# EAGLE board MLX-Panel (EAGLE 7.7.0)
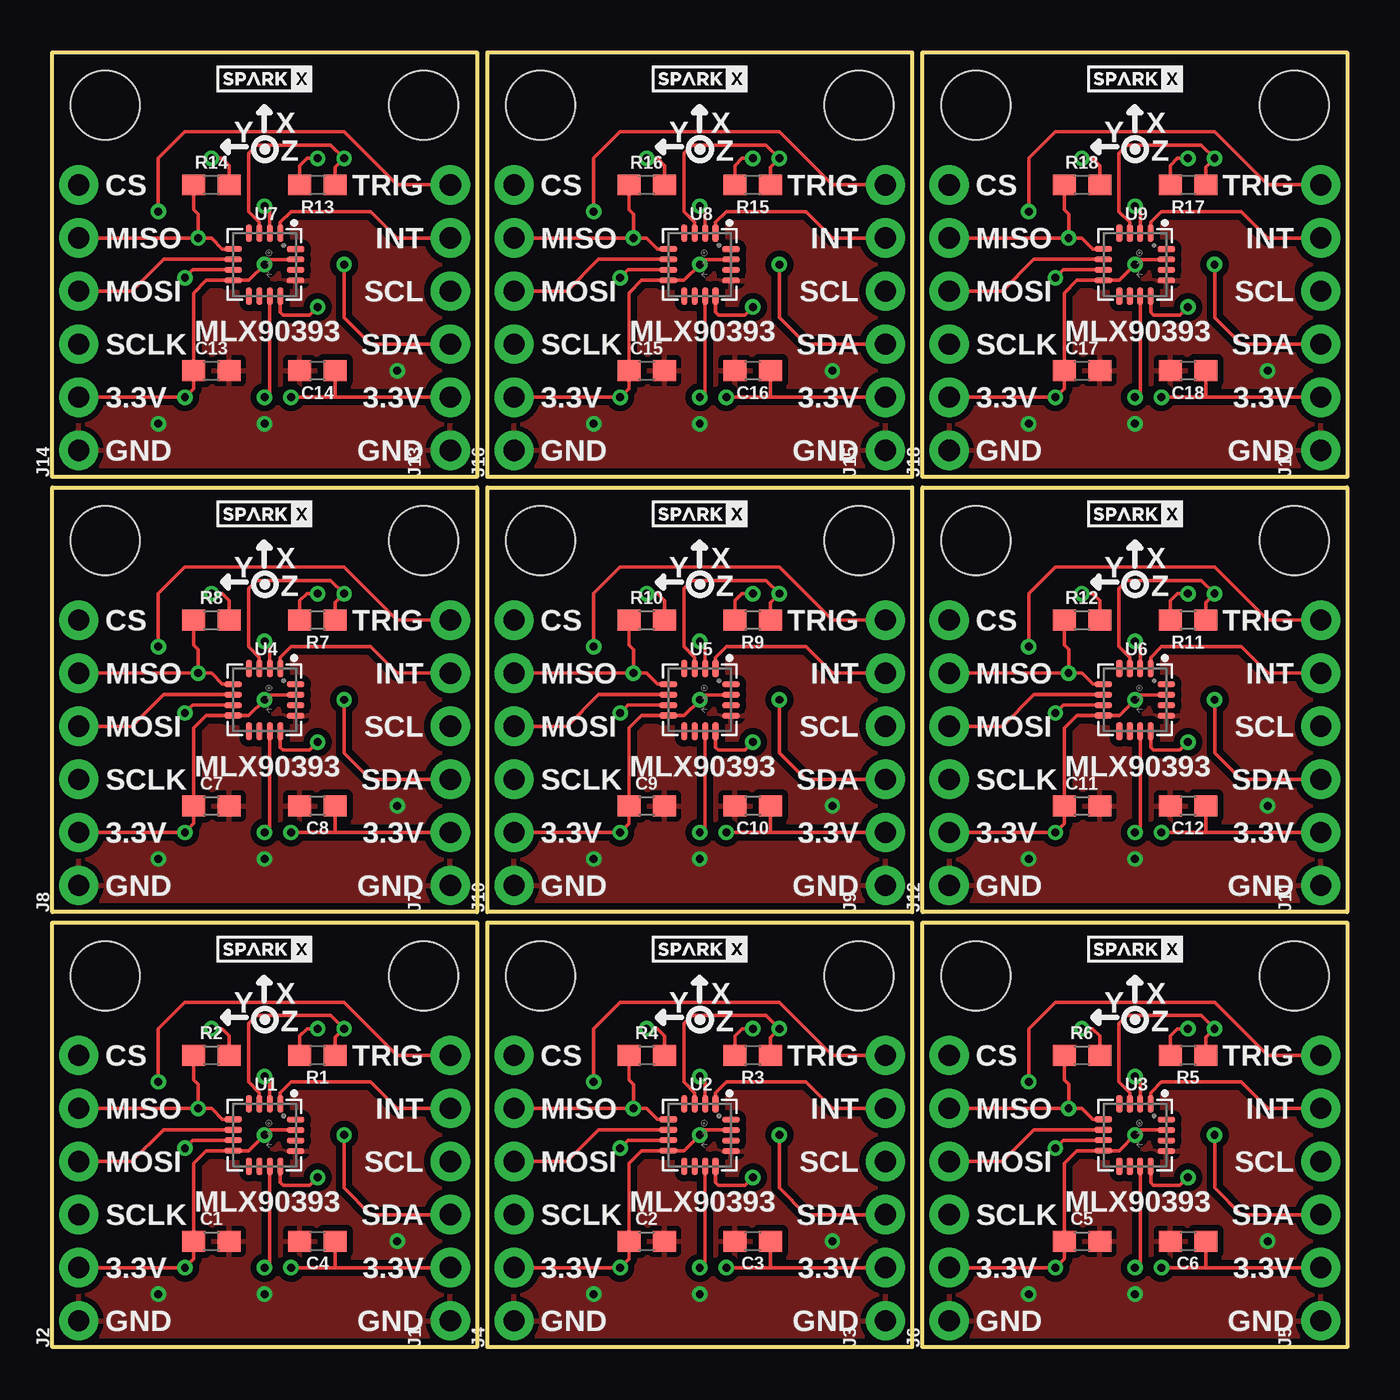
[diagram p0: board, top side]
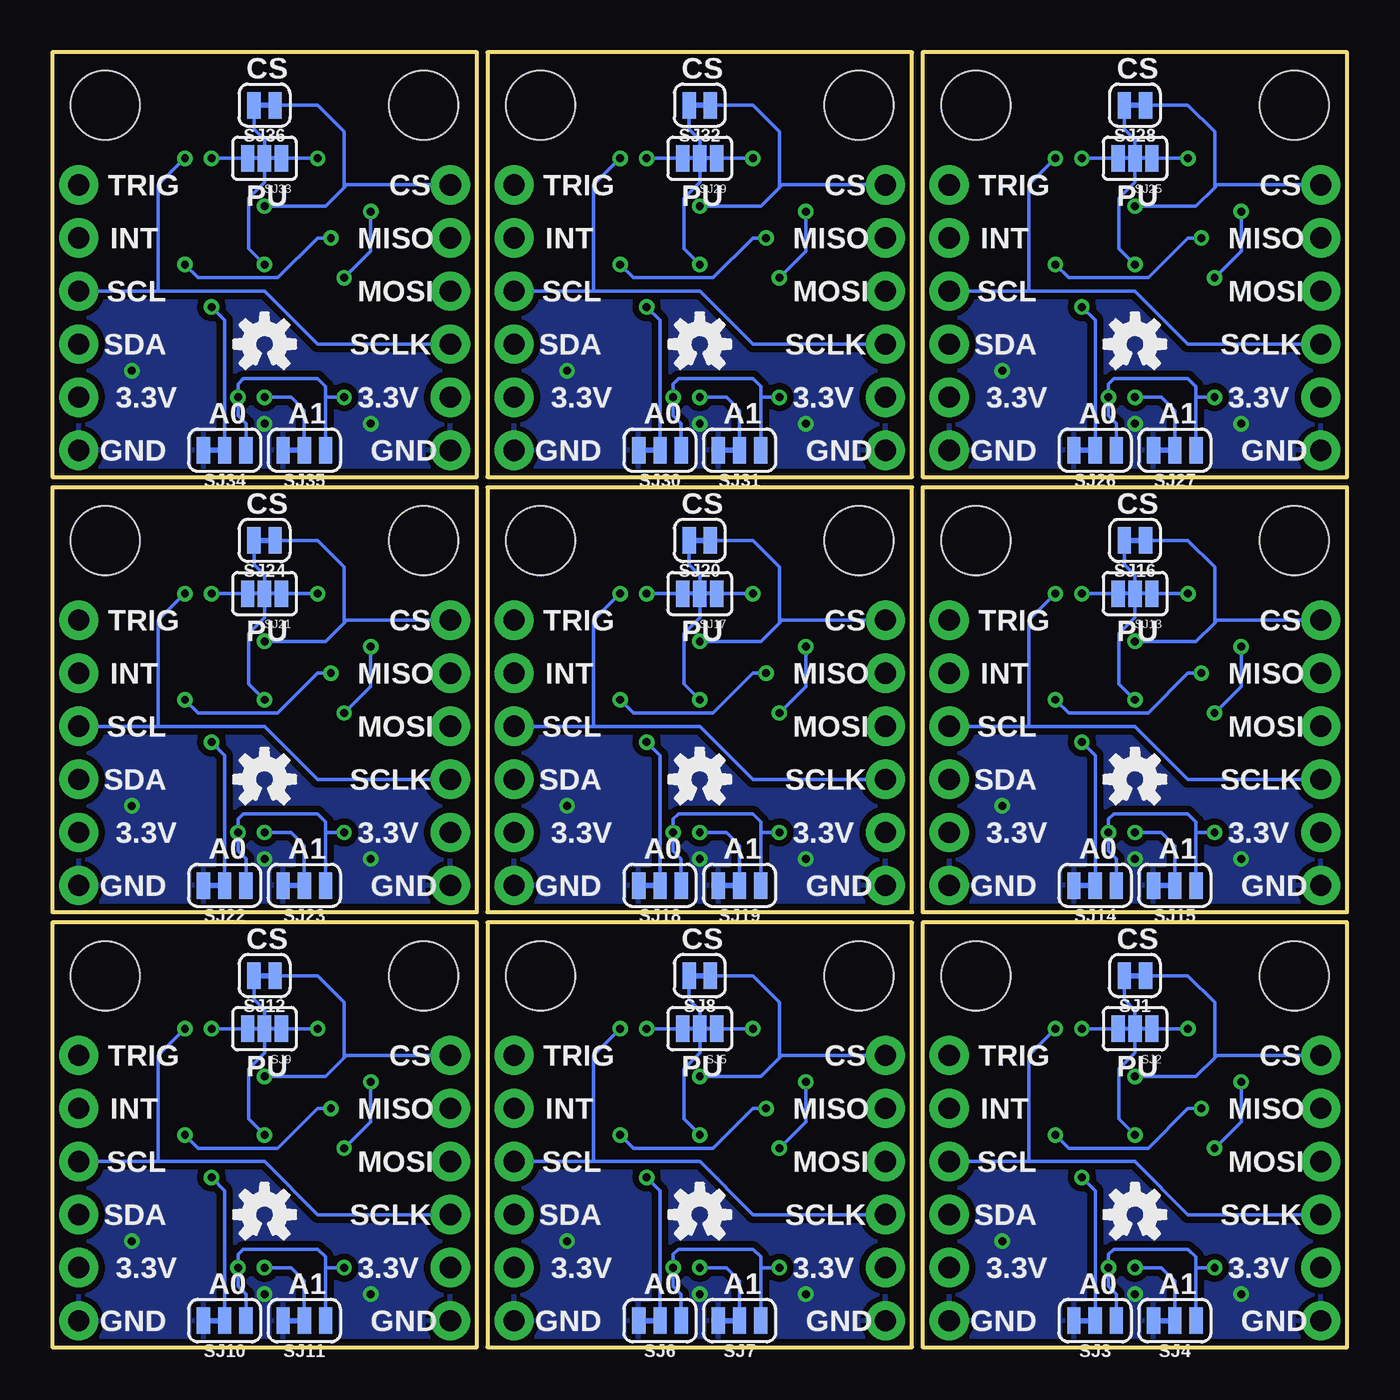
[diagram p1: board, bottom side, seen from below]

Size 61.98 x 61.98 mm. Coordinates in mm from the lower left corner, seen from the top.
Outline: 20.32,0 0,0 0,20.32 20.32,20.32 20.32,0
Outline: 41.15,0 20.83,0 20.83,20.32 41.15,20.32 41.15,0
Outline: 61.98,0 41.66,0 41.66,20.32 61.98,20.32 61.98,0
Outline: 20.32,20.83 0,20.83 0,41.15 20.32,41.15 20.32,20.83
Outline: 41.15,20.83 20.83,20.83 20.83,41.15 41.15,41.15 41.15,20.83
Outline: 61.98,20.83 41.66,20.83 41.66,41.15 61.98,41.15 61.98,20.83
Outline: 20.32,41.66 0,41.66 0,61.98 20.32,61.98 20.32,41.66
Outline: 41.15,41.66 20.83,41.66 20.83,61.98 41.15,61.98 41.15,41.66
Outline: 61.98,41.66 41.66,41.66 41.66,61.98 61.98,61.98 61.98,41.66
Copper layers (1*16): Top 0.035mm / dielectric 1.5mm / Bottom 0.035mm
Design rules "SparkFun-2-layer-TIGHT": minimum track width 7mil, minimum drill 15mil, track to track 7mil, track to pad 7mil, pad to pad 7mil, via to via 7mil, smd to smd 7mil, copper to edge 7mil, drill to drill 7mil, minimum pad ring 7mil, minimum via ring 7mil, stop-mask expansion 4mil, vias tented up to drill 25mil, thermal gap 10mil

## Footprints (pad centres in the part's own frame; a part is rotated, then mirrored left to right if it is on the bottom)
0603 = smd 1.1 x 1: 1 -0.85,0; 2 0.85,0
1X06_NO_SILK = drill 1.016 pad 1.88: 1 0,0; 2 2.54,0; 3 5.08,0; 4 7.62,0; 5 10.16,0; 6 12.7,0
STAND-OFF = hole 3.302: 0,0
SMT-JUMPER_2_NC_TRACE_SILK = smd 0.635 x 1.27: 1 -0.508,0; 2 0.508,0
PAD-JUMPER-3-3OF3_NC_BY_TRACE_YES_SILK_FULL_BOX = smd 0.635 x 1.27: 1 -0.813,0; 2 0,0; 3 0.813,0
SMT-JUMPER_3_1-NC_TRACE_SILK = smd 0.635 x 1.27: 1 -1.016,0; 2 0,0; 3 1.016,0
QFN-16 = smd 0.3 x 0.85: 1 0.754,1.498; 2 0.254,1.498; 3 -0.246,1.498; 4 -0.746,1.498; 9 -0.746,-1.506; 10 -0.246,-1.506; 11 0.254,-1.506; 12 0.754,-1.506 | smd 0.85 x 0.3: 5 -1.508,0.746; 6 -1.508,0.246; 7 -1.508,-0.254; 8 -1.508,-0.754; 13 1.496,-0.764; 14 1.496,-0.264; 15 1.496,0.236; 16 1.496,0.736

## Placement (x,y rotation side)
C1  0.1uF  [0603]  7.62,5.08 0 top
C2  0.1uF  [0603]  28.45,5.08 0 top
C3  0.1uF  [0603]  33.53,5.08 180 top
C4  0.1uF  [0603]  12.7,5.08 180 top
C5  0.1uF  [0603]  49.28,5.08 0 top
C6  0.1uF  [0603]  54.36,5.08 180 top
C7  0.1uF  [0603]  7.62,25.91 0 top
C8  0.1uF  [0603]  12.7,25.91 180 top
C9  0.1uF  [0603]  28.45,25.91 0 top
C10  0.1uF  [0603]  33.53,25.91 180 top
C11  0.1uF  [0603]  49.28,25.91 0 top
C12  0.1uF  [0603]  54.36,25.91 180 top
C13  0.1uF  [0603]  7.62,46.74 0 top
C14  0.1uF  [0603]  12.7,46.74 180 top
C15  0.1uF  [0603]  28.45,46.74 0 top
C16  0.1uF  [0603]  33.53,46.74 180 top
C17  0.1uF  [0603]  49.28,46.74 0 top
C18  0.1uF  [0603]  54.36,46.74 180 top
J1  [1X06_NO_SILK]  19.05,1.27 90 top
J2  [1X06_NO_SILK]  1.27,1.27 90 top
J3  [1X06_NO_SILK]  39.88,1.27 90 top
J4  [1X06_NO_SILK]  22.1,1.27 90 top
J5  [1X06_NO_SILK]  60.71,1.27 90 top
J6  [1X06_NO_SILK]  42.93,1.27 90 top
J7  [1X06_NO_SILK]  19.05,22.1 90 top
J8  [1X06_NO_SILK]  1.27,22.1 90 top
J9  [1X06_NO_SILK]  39.88,22.1 90 top
J10  [1X06_NO_SILK]  22.1,22.1 90 top
J11  [1X06_NO_SILK]  60.71,22.1 90 top
J12  [1X06_NO_SILK]  42.93,22.1 90 top
J13  [1X06_NO_SILK]  19.05,42.93 90 top
J14  [1X06_NO_SILK]  1.27,42.93 90 top
J15  [1X06_NO_SILK]  39.88,42.93 90 top
J16  [1X06_NO_SILK]  22.1,42.93 90 top
J17  [1X06_NO_SILK]  60.71,42.93 90 top
J18  [1X06_NO_SILK]  42.93,42.93 90 top
JP1  STAND-OFF  [STAND-OFF]  23.37,17.78 0 top
JP2  STAND-OFF  [STAND-OFF]  38.61,17.78 0 top
JP3  STAND-OFF  [STAND-OFF]  2.54,17.78 0 top
JP4  STAND-OFF  [STAND-OFF]  17.78,17.78 0 top
JP5  STAND-OFF  [STAND-OFF]  44.2,17.78 0 top
JP6  STAND-OFF  [STAND-OFF]  59.44,17.78 0 top
JP7  STAND-OFF  [STAND-OFF]  2.54,38.61 0 top
JP8  STAND-OFF  [STAND-OFF]  17.78,38.61 0 top
JP9  STAND-OFF  [STAND-OFF]  23.37,38.61 0 top
JP10  STAND-OFF  [STAND-OFF]  38.61,38.61 0 top
JP11  STAND-OFF  [STAND-OFF]  44.2,38.61 0 top
JP12  STAND-OFF  [STAND-OFF]  59.44,38.61 0 top
JP13  STAND-OFF  [STAND-OFF]  2.54,59.44 0 top
JP14  STAND-OFF  [STAND-OFF]  17.78,59.44 0 top
JP15  STAND-OFF  [STAND-OFF]  23.37,59.44 0 top
JP16  STAND-OFF  [STAND-OFF]  38.61,59.44 0 top
JP17  STAND-OFF  [STAND-OFF]  44.2,59.44 0 top
JP18  STAND-OFF  [STAND-OFF]  59.44,59.44 0 top
R1  10k  [0603]  12.7,13.97 180 top
R2  10k  [0603]  7.62,13.97 0 top
R3  10k  [0603]  33.53,13.97 180 top
R4  10k  [0603]  28.45,13.97 0 top
R5  10k  [0603]  54.36,13.97 180 top
R6  10k  [0603]  49.28,13.97 0 top
R7  10k  [0603]  12.7,34.8 180 top
R8  10k  [0603]  7.62,34.8 0 top
R9  10k  [0603]  33.53,34.8 180 top
R10  10k  [0603]  28.45,34.8 0 top
R11  10k  [0603]  54.36,34.8 180 top
R12  10k  [0603]  49.28,34.8 0 top
R13  10k  [0603]  12.7,55.63 180 top
R14  10k  [0603]  7.62,55.63 0 top
R15  10k  [0603]  33.53,55.63 180 top
R16  10k  [0603]  28.45,55.63 0 top
R17  10k  [0603]  54.36,55.63 180 top
R18  10k  [0603]  49.28,55.63 0 top
SJ1  [SMT-JUMPER_2_NC_TRACE_SILK]  10.16,17.78 180 bottom
SJ2  [PAD-JUMPER-3-3OF3_NC_BY_TRACE_YES_SILK_FULL_BOX]  10.16,15.24 180 bottom
SJ3  [SMT-JUMPER_3_1-NC_TRACE_SILK]  12.06,1.27 180 bottom
SJ4  [SMT-JUMPER_3_1-NC_TRACE_SILK]  8.26,1.27 180 bottom
SJ5  [PAD-JUMPER-3-3OF3_NC_BY_TRACE_YES_SILK_FULL_BOX]  30.99,15.24 180 bottom
SJ6  [SMT-JUMPER_3_1-NC_TRACE_SILK]  32.89,1.27 180 bottom
SJ7  [SMT-JUMPER_3_1-NC_TRACE_SILK]  29.08,1.27 180 bottom
SJ8  [SMT-JUMPER_2_NC_TRACE_SILK]  30.99,17.78 180 bottom
SJ9  [PAD-JUMPER-3-3OF3_NC_BY_TRACE_YES_SILK_FULL_BOX]  51.82,15.24 180 bottom
SJ10  [SMT-JUMPER_3_1-NC_TRACE_SILK]  53.72,1.27 180 bottom
SJ11  [SMT-JUMPER_3_1-NC_TRACE_SILK]  49.91,1.27 180 bottom
SJ12  [SMT-JUMPER_2_NC_TRACE_SILK]  51.82,17.78 180 bottom
SJ13  [PAD-JUMPER-3-3OF3_NC_BY_TRACE_YES_SILK_FULL_BOX]  10.16,36.07 180 bottom
SJ14  [SMT-JUMPER_3_1-NC_TRACE_SILK]  12.06,22.1 180 bottom
SJ15  [SMT-JUMPER_3_1-NC_TRACE_SILK]  8.26,22.1 180 bottom
SJ16  [SMT-JUMPER_2_NC_TRACE_SILK]  10.16,38.61 180 bottom
SJ17  [PAD-JUMPER-3-3OF3_NC_BY_TRACE_YES_SILK_FULL_BOX]  30.99,36.07 180 bottom
SJ18  [SMT-JUMPER_3_1-NC_TRACE_SILK]  32.89,22.1 180 bottom
SJ19  [SMT-JUMPER_3_1-NC_TRACE_SILK]  29.08,22.1 180 bottom
SJ20  [SMT-JUMPER_2_NC_TRACE_SILK]  30.99,38.61 180 bottom
SJ21  [PAD-JUMPER-3-3OF3_NC_BY_TRACE_YES_SILK_FULL_BOX]  51.82,36.07 180 bottom
SJ22  [SMT-JUMPER_3_1-NC_TRACE_SILK]  53.72,22.1 180 bottom
SJ23  [SMT-JUMPER_3_1-NC_TRACE_SILK]  49.91,22.1 180 bottom
SJ24  [SMT-JUMPER_2_NC_TRACE_SILK]  51.82,38.61 180 bottom
SJ25  [PAD-JUMPER-3-3OF3_NC_BY_TRACE_YES_SILK_FULL_BOX]  10.16,56.9 180 bottom
SJ26  [SMT-JUMPER_3_1-NC_TRACE_SILK]  12.06,42.93 180 bottom
SJ27  [SMT-JUMPER_3_1-NC_TRACE_SILK]  8.26,42.93 180 bottom
SJ28  [SMT-JUMPER_2_NC_TRACE_SILK]  10.16,59.44 180 bottom
SJ29  [PAD-JUMPER-3-3OF3_NC_BY_TRACE_YES_SILK_FULL_BOX]  30.99,56.9 180 bottom
SJ30  [SMT-JUMPER_3_1-NC_TRACE_SILK]  32.89,42.93 180 bottom
SJ31  [SMT-JUMPER_3_1-NC_TRACE_SILK]  29.08,42.93 180 bottom
SJ32  [SMT-JUMPER_2_NC_TRACE_SILK]  30.99,59.44 180 bottom
SJ33  [PAD-JUMPER-3-3OF3_NC_BY_TRACE_YES_SILK_FULL_BOX]  51.82,56.9 180 bottom
SJ34  [SMT-JUMPER_3_1-NC_TRACE_SILK]  53.72,42.93 180 bottom
SJ35  [SMT-JUMPER_3_1-NC_TRACE_SILK]  49.91,42.93 180 bottom
SJ36  [SMT-JUMPER_2_NC_TRACE_SILK]  51.82,59.44 180 bottom
U1  MLX90393_MAGNETOMETER  [QFN-16]  10.16,10.16 0 top
U2  MLX90393_MAGNETOMETER  [QFN-16]  30.99,10.16 0 top
U3  MLX90393_MAGNETOMETER  [QFN-16]  51.82,10.16 0 top
U4  MLX90393_MAGNETOMETER  [QFN-16]  10.16,30.99 0 top
U5  MLX90393_MAGNETOMETER  [QFN-16]  30.99,30.99 0 top
U6  MLX90393_MAGNETOMETER  [QFN-16]  51.82,30.99 0 top
U7  MLX90393_MAGNETOMETER  [QFN-16]  10.16,51.82 0 top
U8  MLX90393_MAGNETOMETER  [QFN-16]  30.99,51.82 0 top
U9  MLX90393_MAGNETOMETER  [QFN-16]  51.82,51.82 0 top
U$1  OSHW-LOGOS  [OSHW-LOGO-S]  10.16,6.35 0 bottom
U$2  SPARKX-LOGO2  [SPARKX-TINY]  10.16,19.05 0 top
U$3  OSHW-LOGOS  [OSHW-LOGO-S]  30.99,6.35 0 bottom
U$4  SPARKX-LOGO2  [SPARKX-TINY]  30.99,19.05 0 top
U$5  OSHW-LOGOS  [OSHW-LOGO-S]  51.82,6.35 0 bottom
U$6  SPARKX-LOGO2  [SPARKX-TINY]  51.82,19.05 0 top
U$7  OSHW-LOGOS  [OSHW-LOGO-S]  10.16,27.18 0 bottom
U$8  SPARKX-LOGO2  [SPARKX-TINY]  10.16,39.88 0 top
U$9  OSHW-LOGOS  [OSHW-LOGO-S]  30.99,27.18 0 bottom
U$10  SPARKX-LOGO2  [SPARKX-TINY]  30.99,39.88 0 top
U$11  OSHW-LOGOS  [OSHW-LOGO-S]  51.82,27.18 0 bottom
U$12  SPARKX-LOGO2  [SPARKX-TINY]  51.82,39.88 0 top
U$13  OSHW-LOGOS  [OSHW-LOGO-S]  10.16,48.01 0 bottom
U$14  SPARKX-LOGO2  [SPARKX-TINY]  10.16,60.71 0 top
U$15  OSHW-LOGOS  [OSHW-LOGO-S]  30.99,48.01 0 bottom
U$16  SPARKX-LOGO2  [SPARKX-TINY]  30.99,60.71 0 top
U$17  OSHW-LOGOS  [OSHW-LOGO-S]  51.82,48.01 0 bottom
U$18  SPARKX-LOGO2  [SPARKX-TINY]  51.82,60.71 0 top

## Library data of the parts
C1-C18 = SparkFun-Capacitors; PROD_ID: CAP-00810
J1-J18 = SparkFun-Connectors; PROD_ID: CONN-08437
JP1-JP18 U$1 U$3 U$5 U$7 U$9 U$11 U$13 U$15 U$17 = SparkFun
R1-R18 = SparkFun-Resistors; PROD_ID: RES-00824
SJ1 SJ3 SJ4 SJ6-SJ8 SJ10-SJ12 SJ14-SJ16 SJ18-SJ20 SJ22-SJ24 SJ26-SJ28 SJ30-SJ32 SJ34-SJ36 = SparkFun-Jumpers
SJ2 SJ5 SJ9 SJ13 SJ17 SJ21 SJ25 SJ29 SJ33 = TestAperatures
U1-U9 U$2 U$4 U$6 U$8 U$10 U$12 U$14 U$16 U$18 = SparkX

## Nets
3.3V: C1.1 C4.1 J1.2 J2.2 SJ1.2 SJ2.2 SJ3.1 SJ4.1 U1.8 U1.15
3.3V1: C2.1 C3.1 J3.2 J4.2 SJ5.2 SJ6.1 SJ7.1 SJ8.2 U2.8 U2.15
3.3V2: C5.1 C6.1 J5.2 J6.2 SJ9.2 SJ10.1 SJ11.1 SJ12.2 U3.8 U3.15
3.3V3: C7.1 C8.1 J7.2 J8.2 SJ13.2 SJ14.1 SJ15.1 SJ16.2 U4.8 U4.15
3.3V4: C9.1 C10.1 J9.2 J10.2 SJ17.2 SJ18.1 SJ19.1 SJ20.2 U5.8 U5.15
3.3V5: C11.1 C12.1 J11.2 J12.2 SJ21.2 SJ22.1 SJ23.1 SJ24.2 U6.8 U6.15
3.3V6: C13.1 C14.1 J13.2 J14.2 SJ25.2 SJ26.1 SJ27.1 SJ28.2 U7.8 U7.15
3.3V7: C15.1 C16.1 J15.2 J16.2 SJ29.2 SJ30.1 SJ31.1 SJ32.2 U8.8 U8.15
3.3V8: C17.1 C18.1 J17.2 J18.2 SJ33.2 SJ34.1 SJ35.1 SJ36.2 U9.8 U9.15
A0: SJ3.2 U1.12
A1: SJ4.2 U1.11
A2: SJ6.2 U2.12
A3: SJ7.2 U2.11
A4: SJ10.2 U3.12
A5: SJ11.2 U3.11
A6: SJ14.2 U4.12
A7: SJ15.2 U4.11
A8: SJ18.2 U5.12
A9: SJ19.2 U5.11
A10: SJ22.2 U6.12
A11: SJ23.2 U6.11
A12: SJ26.2 U7.12
A13: SJ27.2 U7.11
A14: SJ30.2 U8.12
A15: SJ31.2 U8.11
A16: SJ34.2 U9.12
A17: SJ35.2 U9.11
CS: J2.6 SJ1.1 U1.2
CS1: J4.6 SJ8.1 U2.2
CS2: J6.6 SJ12.1 U3.2
CS3: J8.6 SJ16.1 U4.2
CS4: J10.6 SJ20.1 U5.2
CS5: J12.6 SJ24.1 U6.2
CS6: J14.6 SJ28.1 U7.2
CS7: J16.6 SJ32.1 U8.2
CS8: J18.6 SJ36.1 U9.2
GND9: C1.2 C4.2 J1.1 J2.1 SJ3.3 SJ4.3 U1.13
GND10: C2.2 C3.2 J3.1 J4.1 SJ6.3 SJ7.3 U2.13
GND11: C5.2 C6.2 J5.1 J6.1 SJ10.3 SJ11.3 U3.13
GND12: C7.2 C8.2 J7.1 J8.1 SJ14.3 SJ15.3 U4.13
GND13: C9.2 C10.2 J9.1 J10.1 SJ18.3 SJ19.3 U5.13
GND14: C11.2 C12.2 J11.1 J12.1 SJ22.3 SJ23.3 U6.13
GND15: C13.2 C14.2 J13.1 J14.1 SJ26.3 SJ27.3 U7.13
GND16: C15.2 C16.2 J15.1 J16.1 SJ30.3 SJ31.3 U8.13
GND17: C17.2 C18.2 J17.1 J18.1 SJ34.3 SJ35.3 U9.13
INT: J1.5 U1.1
INT1: J3.5 U2.1
INT2: J5.5 U3.1
INT3: J7.5 U4.1
INT4: J9.5 U5.1
INT5: J11.5 U6.1
INT6: J13.5 U7.1
INT7: J15.5 U8.1
INT8: J17.5 U9.1
MISO: J2.4 U1.6
MISO1: J4.4 U2.6
MISO2: J6.4 U3.6
MISO3: J8.4 U4.6
MISO4: J10.4 U5.6
MISO5: J12.4 U6.6
MISO6: J14.4 U7.6
MISO7: J16.4 U8.6
MISO8: J18.4 U9.6
N$1: R4.2 SJ5.1
N$2: R3.2 SJ5.3
N$3: R6.2 SJ9.1
N$4: R2.2 SJ2.1
N$5: R1.2 SJ2.3
N$6: R5.2 SJ9.3
N$7: R8.2 SJ13.1
N$8: R7.2 SJ13.3
N$9: R10.2 SJ17.1
N$10: R9.2 SJ17.3
N$11: R12.2 SJ21.1
N$12: R11.2 SJ21.3
N$13: R14.2 SJ25.1
N$14: R13.2 SJ25.3
N$15: R16.2 SJ29.1
N$16: R15.2 SJ29.3
N$17: R18.2 SJ33.1
N$18: R17.2 SJ33.3
SCL: J1.4 J2.3 R1.1 U1.3
SCL1: J3.4 J4.3 R3.1 U2.3
SCL2: J5.4 J6.3 R5.1 U3.3
SCL3: J7.4 J8.3 R7.1 U4.3
SCL4: J9.4 J10.3 R9.1 U5.3
SCL5: J11.4 J12.3 R11.1 U6.3
SCL6: J13.4 J14.3 R13.1 U7.3
SCL7: J15.4 J16.3 R15.1 U8.3
SCL8: J17.4 J18.3 R17.1 U9.3
SDA: J1.3 J2.5 R2.1 U1.5
SDA1: J3.3 J4.5 R4.1 U2.5
SDA2: J5.3 J6.5 R6.1 U3.5
SDA3: J7.3 J8.5 R8.1 U4.5
SDA4: J9.3 J10.5 R10.1 U5.5
SDA5: J11.3 J12.5 R12.1 U6.5
SDA6: J13.3 J14.5 R14.1 U7.5
SDA7: J15.3 J16.5 R16.1 U8.5
SDA8: J17.3 J18.5 R18.1 U9.5
TRIG: J1.6 U1.7
TRIG1: J3.6 U2.7
TRIG2: J5.6 U3.7
TRIG3: J7.6 U4.7
TRIG4: J9.6 U5.7
TRIG5: J11.6 U6.7
TRIG6: J13.6 U7.7
TRIG7: J15.6 U8.7
TRIG8: J17.6 U9.7

## Tracks (layer width: path | path; a pad name or v marks a point on that pad's centre or on a via)
3.3V  (via drill 0.38)
  Top 0.178: U1.15 10.4,10.4 v10.16,10.16 9.41,9.41 U1.8 7.37,9.41 6.77,8.8 C1.1 6.77,4.23 v6.35,3.81 J2.2 | v11.43,3.81 13.46,3.81 | 13.46,3.81 J1.2 | C4.1 13.55,3.9 13.46,3.81
  Bottom 0.178: SJ1.2 10.67,16.64 10.16,16.13 SJ2.2 10.16,14.1 10.92,13.34 10.92,10.92 v10.16,10.16 | SJ4.1 7.24,3.81 | 7.24,3.81 7.24,4.32 7.62,4.7 11.18,4.7 11.43,4.45 v11.43,3.81 11.43,2.92 11.05,2.54 SJ3.1 | v6.35,3.81 7.24,3.81
3.3V1  (via drill 0.38)
  Top 0.178: U2.15 31.22,10.4 v30.99,10.16 30.23,9.41 U2.8 28.2,9.41 27.6,8.8 C2.1 27.6,4.23 v27.18,3.81 J4.2 | v32.26,3.81 34.29,3.81 | 34.29,3.81 J3.2 | C3.1 34.38,3.9 34.29,3.81
  Bottom 0.178: SJ8.2 31.5,16.64 30.99,16.13 SJ5.2 30.99,14.1 31.75,13.34 31.75,10.92 v30.99,10.16 | SJ7.1 28.07,3.81 | 28.07,3.81 28.07,4.32 28.45,4.7 32,4.7 32.26,4.45 v32.26,3.81 32.26,2.92 31.88,2.54 SJ6.1 | v27.18,3.81 28.07,3.81
3.3V2  (via drill 0.38)
  Top 0.178: U3.15 52.05,10.4 v51.82,10.16 51.06,9.41 U3.8 49.03,9.41 48.43,8.8 C5.1 48.43,4.23 v48.01,3.81 J6.2 | v53.09,3.81 55.12,3.81 | 55.12,3.81 J5.2 | C6.1 55.21,3.9 55.12,3.81
  Bottom 0.178: SJ12.2 52.32,16.64 51.82,16.13 SJ9.2 51.82,14.1 52.58,13.34 52.58,10.92 v51.82,10.16 | SJ11.1 48.9,3.81 | 48.9,3.81 48.9,4.32 49.28,4.7 52.83,4.7 53.09,4.45 v53.09,3.81 53.09,2.92 52.7,2.54 SJ10.1 | v48.01,3.81 48.9,3.81
3.3V3  (via drill 0.38)
  Top 0.178: U4.15 10.4,31.22 v10.16,30.99 9.41,30.23 U4.8 7.37,30.23 6.77,29.63 C7.1 6.77,25.06 v6.35,24.64 J8.2 | v11.43,24.64 13.46,24.64 | 13.46,24.64 J7.2 | C8.1 13.55,24.73 13.46,24.64
  Bottom 0.178: SJ16.2 10.67,37.47 10.16,36.96 SJ13.2 10.16,34.92 10.92,34.16 10.92,31.75 v10.16,30.99 | SJ15.1 7.24,24.64 | 7.24,24.64 7.24,25.15 7.62,25.53 11.18,25.53 11.43,25.27 v11.43,24.64 11.43,23.75 11.05,23.37 SJ14.1 | v6.35,24.64 7.24,24.64
3.3V4  (via drill 0.38)
  Top 0.178: U5.15 31.22,31.22 v30.99,30.99 30.23,30.23 U5.8 28.2,30.23 27.6,29.63 C9.1 27.6,25.06 v27.18,24.64 J10.2 | v32.26,24.64 34.29,24.64 | 34.29,24.64 J9.2 | C10.1 34.38,24.73 34.29,24.64
  Bottom 0.178: SJ20.2 31.5,37.47 30.99,36.96 SJ17.2 30.99,34.92 31.75,34.16 31.75,31.75 v30.99,30.99 | SJ19.1 28.07,24.64 | 28.07,24.64 28.07,25.15 28.45,25.53 32,25.53 32.26,25.27 v32.26,24.64 32.26,23.75 31.88,23.37 SJ18.1 | v27.18,24.64 28.07,24.64
3.3V5  (via drill 0.38)
  Top 0.178: U6.15 52.05,31.22 v51.82,30.99 51.06,30.23 U6.8 49.03,30.23 48.43,29.63 C11.1 48.43,25.06 v48.01,24.64 J12.2 | v53.09,24.64 55.12,24.64 | 55.12,24.64 J11.2 | C12.1 55.21,24.73 55.12,24.64
  Bottom 0.178: SJ24.2 52.32,37.47 51.82,36.96 SJ21.2 51.82,34.92 52.58,34.16 52.58,31.75 v51.82,30.99 | SJ23.1 48.9,24.64 | 48.9,24.64 48.9,25.15 49.28,25.53 52.83,25.53 53.09,25.27 v53.09,24.64 53.09,23.75 52.7,23.37 SJ22.1 | v48.01,24.64 48.9,24.64
3.3V6  (via drill 0.38)
  Top 0.178: U7.15 10.4,52.05 v10.16,51.82 9.41,51.06 U7.8 7.37,51.06 6.77,50.46 C13.1 6.77,45.89 v6.35,45.47 J14.2 | v11.43,45.47 13.46,45.47 | 13.46,45.47 J13.2 | C14.1 13.55,45.55 13.46,45.47
  Bottom 0.178: SJ28.2 10.67,58.29 10.16,57.78 SJ25.2 10.16,55.75 10.92,54.99 10.92,52.58 v10.16,51.82 | SJ27.1 7.24,45.47 | 7.24,45.47 7.24,45.97 7.62,46.35 11.18,46.35 11.43,46.1 v11.43,45.47 11.43,44.58 11.05,44.2 SJ26.1 | v6.35,45.47 7.24,45.47
3.3V7  (via drill 0.38)
  Top 0.178: U8.15 31.22,52.05 v30.99,51.82 30.23,51.06 U8.8 28.2,51.06 27.6,50.46 C15.1 27.6,45.89 v27.18,45.47 J16.2 | v32.26,45.47 34.29,45.47 | 34.29,45.47 J15.2 | C16.1 34.38,45.55 34.29,45.47
  Bottom 0.178: SJ32.2 31.5,58.29 30.99,57.78 SJ29.2 30.99,55.75 31.75,54.99 31.75,52.58 v30.99,51.82 | SJ31.1 28.07,45.47 | 28.07,45.47 28.07,45.97 28.45,46.35 32,46.35 32.26,46.1 v32.26,45.47 32.26,44.58 31.88,44.2 SJ30.1 | v27.18,45.47 28.07,45.47
3.3V8  (via drill 0.38)
  Top 0.178: U9.15 52.05,52.05 v51.82,51.82 51.06,51.06 U9.8 49.03,51.06 48.43,50.46 C17.1 48.43,45.89 v48.01,45.47 J18.2 | v53.09,45.47 55.12,45.47 | 55.12,45.47 J17.2 | C18.1 55.21,45.55 55.12,45.47
  Bottom 0.178: SJ36.2 52.32,58.29 51.82,57.78 SJ33.2 51.82,55.75 52.58,54.99 52.58,52.58 v51.82,51.82 | SJ35.1 48.9,45.47 | 48.9,45.47 48.9,45.97 49.28,46.35 52.83,46.35 53.09,46.1 v53.09,45.47 53.09,44.58 52.7,44.2 SJ34.1 | v48.01,45.47 48.9,45.47
A0  (via drill 0.38)
  Top 0.178: U1.12 10.91,7.88 11.05,7.75 12.32,7.75 v12.7,8.13
  Bottom 0.178: SJ3.2 12.06,7.49 v12.7,8.13
A1  (via drill 0.38)
  Top 0.178: U1.11 10.41,4.06 v10.16,3.81
  Bottom 0.178: v10.16,3.81 8.89,3.81 8.26,3.17 SJ4.2
A2  (via drill 0.38)
  Top 0.178: U2.12 31.74,7.88 31.88,7.75 33.15,7.75 v33.53,8.13
  Bottom 0.178: SJ6.2 32.89,7.49 v33.53,8.13
A3  (via drill 0.38)
  Top 0.178: U2.11 31.24,4.06 v30.99,3.81
  Bottom 0.178: v30.99,3.81 29.72,3.81 29.08,3.17 SJ7.2
A4  (via drill 0.38)
  Top 0.178: U3.12 52.57,7.88 52.7,7.75 53.98,7.75 v54.36,8.13
  Bottom 0.178: SJ10.2 53.72,7.49 v54.36,8.13
A5  (via drill 0.38)
  Top 0.178: U3.11 52.07,4.06 v51.82,3.81
  Bottom 0.178: v51.82,3.81 50.55,3.81 49.91,3.17 SJ11.2
A6  (via drill 0.38)
  Top 0.178: U4.12 10.91,28.71 11.05,28.57 12.32,28.57 v12.7,28.96
  Bottom 0.178: SJ14.2 12.06,28.32 v12.7,28.96
A7  (via drill 0.38)
  Top 0.178: U4.11 10.41,24.89 v10.16,24.64
  Bottom 0.178: v10.16,24.64 8.89,24.64 8.26,24 SJ15.2
A8  (via drill 0.38)
  Top 0.178: U5.12 31.74,28.71 31.88,28.57 33.15,28.57 v33.53,28.96
  Bottom 0.178: SJ18.2 32.89,28.32 v33.53,28.96
A9  (via drill 0.38)
  Top 0.178: U5.11 31.24,24.89 v30.99,24.64
  Bottom 0.178: v30.99,24.64 29.72,24.64 29.08,24 SJ19.2
A10  (via drill 0.38)
  Top 0.178: U6.12 52.57,28.71 52.7,28.57 53.98,28.57 v54.36,28.96
  Bottom 0.178: SJ22.2 53.72,28.32 v54.36,28.96
A11  (via drill 0.38)
  Top 0.178: U6.11 52.07,24.89 v51.82,24.64
  Bottom 0.178: v51.82,24.64 50.55,24.64 49.91,24 SJ23.2
A12  (via drill 0.38)
  Top 0.178: U7.12 10.91,49.54 11.05,49.4 12.32,49.4 v12.7,49.78
  Bottom 0.178: SJ26.2 12.06,49.15 v12.7,49.78
A13  (via drill 0.38)
  Top 0.178: U7.11 10.41,45.72 v10.16,45.47
  Bottom 0.178: v10.16,45.47 8.89,45.47 8.26,44.83 SJ27.2
A14  (via drill 0.38)
  Top 0.178: U8.12 31.74,49.54 31.88,49.4 33.15,49.4 v33.53,49.78
  Bottom 0.178: SJ30.2 32.89,49.15 v33.53,49.78
A15  (via drill 0.38)
  Top 0.178: U8.11 31.24,45.72 v30.99,45.47
  Bottom 0.178: v30.99,45.47 29.72,45.47 29.08,44.83 SJ31.2
A16  (via drill 0.38)
  Top 0.178: U9.12 52.57,49.54 52.7,49.4 53.98,49.4 v54.36,49.78
  Bottom 0.178: SJ34.2 53.72,49.15 v54.36,49.78
A17  (via drill 0.38)
  Top 0.178: U9.11 52.07,45.72 v51.82,45.47
  Bottom 0.178: v51.82,45.47 50.55,45.47 49.91,44.83 SJ35.2
CS  (via drill 0.38)
  Top 0.178: U1.2 10.41,12.7 v10.16,12.95
  Bottom 0.178: SJ1.1 7.62,17.78 6.35,16.51 6.35,13.84 | v10.16,12.95 7.24,12.95 6.35,13.84 | J2.6 6.22,13.97 6.35,13.84
CS1  (via drill 0.38)
  Top 0.178: U2.2 31.24,12.7 v30.99,12.95
  Bottom 0.178: SJ8.1 28.45,17.78 27.18,16.51 27.18,13.84 | v30.99,12.95 28.07,12.95 27.18,13.84 | J4.6 27.05,13.97 27.18,13.84
CS2  (via drill 0.38)
  Top 0.178: U3.2 52.07,12.7 v51.82,12.95
  Bottom 0.178: SJ12.1 49.28,17.78 48.01,16.51 48.01,13.84 | v51.82,12.95 48.9,12.95 48.01,13.84 | J6.6 47.88,13.97 48.01,13.84
CS3  (via drill 0.38)
  Top 0.178: U4.2 10.41,33.53 v10.16,33.78
  Bottom 0.178: SJ16.1 7.62,38.61 6.35,37.34 6.35,34.67 | v10.16,33.78 7.24,33.78 6.35,34.67 | J8.6 6.22,34.8 6.35,34.67
CS4  (via drill 0.38)
  Top 0.178: U5.2 31.24,33.53 v30.99,33.78
  Bottom 0.178: SJ20.1 28.45,38.61 27.18,37.34 27.18,34.67 | v30.99,33.78 28.07,33.78 27.18,34.67 | J10.6 27.05,34.8 27.18,34.67
CS5  (via drill 0.38)
  Top 0.178: U6.2 52.07,33.53 v51.82,33.78
  Bottom 0.178: SJ24.1 49.28,38.61 48.01,37.34 48.01,34.67 | v51.82,33.78 48.9,33.78 48.01,34.67 | J12.6 47.88,34.8 48.01,34.67
CS6  (via drill 0.38)
  Top 0.178: U7.2 10.41,54.36 v10.16,54.61
  Bottom 0.178: SJ28.1 7.62,59.44 6.35,58.17 6.35,55.5 | v10.16,54.61 7.24,54.61 6.35,55.5 | J14.6 6.22,55.63 6.35,55.5
CS7  (via drill 0.38)
  Top 0.178: U8.2 31.24,54.36 v30.99,54.61
  Bottom 0.178: SJ32.1 28.45,59.44 27.18,58.17 27.18,55.5 | v30.99,54.61 28.07,54.61 27.18,55.5 | J16.6 27.05,55.63 27.18,55.5
CS8  (via drill 0.38)
  Top 0.178: U9.2 52.07,54.36 v51.82,54.61
  Bottom 0.178: SJ36.1 49.28,59.44 48.01,58.17 48.01,55.5 | v51.82,54.61 48.9,54.61 48.01,55.5 | J18.6 47.88,55.63 48.01,55.5
GND9  (via drill 0.38)
  other vias: 5.08,2.54 10.16,2.54 16.51,5.08
  pour Top (isolate 0.305): 0,20.32 0,0 20.32,0 20.32,20.32
  pour Bottom (isolate 0.305): 0,20.32 0,0 20.32,0 20.32,20.32
GND10  (via drill 0.38)
  other vias: 25.91,2.54 30.99,2.54 37.34,5.08
  pour Top (isolate 0.305): 20.83,20.32 20.83,0 41.15,0 41.15,20.32
  pour Bottom (isolate 0.305): 20.83,20.32 20.83,0 41.15,0 41.15,20.32
GND11  (via drill 0.38)
  other vias: 46.74,2.54 51.82,2.54 58.17,5.08
  pour Top (isolate 0.305): 41.66,20.32 41.66,0 61.98,0 61.98,20.32
  pour Bottom (isolate 0.305): 41.66,20.32 41.66,0 61.98,0 61.98,20.32
GND12  (via drill 0.38)
  other vias: 5.08,23.37 10.16,23.37 16.51,25.91
  pour Top (isolate 0.305): 0,41.15 0,20.83 20.32,20.83 20.32,41.15
  pour Bottom (isolate 0.305): 0,41.15 0,20.83 20.32,20.83 20.32,41.15
GND13  (via drill 0.38)
  other vias: 25.91,23.37 30.99,23.37 37.34,25.91
  pour Top (isolate 0.305): 20.83,41.15 20.83,20.83 41.15,20.83 41.15,41.15
  pour Bottom (isolate 0.305): 20.83,41.15 20.83,20.83 41.15,20.83 41.15,41.15
GND14  (via drill 0.38)
  other vias: 46.74,23.37 51.82,23.37 58.17,25.91
  pour Top (isolate 0.305): 41.66,41.15 41.66,20.83 61.98,20.83 61.98,41.15
  pour Bottom (isolate 0.305): 41.66,41.15 41.66,20.83 61.98,20.83 61.98,41.15
GND15  (via drill 0.38)
  other vias: 5.08,44.2 10.16,44.2 16.51,46.74
  pour Top (isolate 0.305): 0,61.98 0,41.66 20.32,41.66 20.32,61.98
  pour Bottom (isolate 0.305): 0,61.98 0,41.66 20.32,41.66 20.32,61.98
GND16  (via drill 0.38)
  other vias: 25.91,44.2 30.99,44.2 37.34,46.74
  pour Top (isolate 0.305): 20.83,61.98 20.83,41.66 41.15,41.66 41.15,61.98
  pour Bottom (isolate 0.305): 20.83,61.98 20.83,41.66 41.15,41.66 41.15,61.98
GND17  (via drill 0.38)
  other vias: 46.74,44.2 51.82,44.2 58.17,46.74
  pour Top (isolate 0.305): 41.66,61.98 41.66,41.66 61.98,41.66 61.98,61.98
  pour Bottom (isolate 0.305): 41.66,61.98 41.66,41.66 61.98,41.66 61.98,61.98
INT
  Top 0.178: U1.1 10.91,12.18 11.43,12.7 15.24,12.7 16.51,11.43 J1.5
INT1
  Top 0.178: U2.1 31.74,12.18 32.26,12.7 36.07,12.7 37.34,11.43 J3.5
INT2
  Top 0.178: U3.1 52.57,12.18 53.09,12.7 56.9,12.7 58.17,11.43 J5.5
INT3
  Top 0.178: U4.1 10.91,33.01 11.43,33.53 15.24,33.53 16.51,32.26 J7.5
INT4
  Top 0.178: U5.1 31.74,33.01 32.26,33.53 36.07,33.53 37.34,32.26 J9.5
INT5
  Top 0.178: U6.1 52.57,33.01 53.09,33.53 56.9,33.53 58.17,32.26 J11.5
INT6
  Top 0.178: U7.1 10.91,53.84 11.43,54.36 15.24,54.36 16.51,53.09 J13.5
INT7
  Top 0.178: U8.1 31.74,53.84 32.26,54.36 36.07,54.36 37.34,53.09 J15.5
INT8
  Top 0.178: U9.1 52.57,53.84 53.09,54.36 56.9,54.36 58.17,53.09 J17.5
MISO
  Top 0.178: U1.6 5.33,10.41 3.81,8.89 J2.4
MISO1
  Top 0.178: U2.6 26.15,10.41 24.64,8.89 J4.4
MISO2
  Top 0.178: U3.6 46.98,10.41 45.47,8.89 J6.4
MISO3
  Top 0.178: U4.6 5.33,31.23 3.81,29.72 J8.4
MISO4
  Top 0.178: U5.6 26.15,31.23 24.64,29.72 J10.4
MISO5
  Top 0.178: U6.6 46.98,31.23 45.47,29.72 J12.4
MISO6
  Top 0.178: U7.6 5.33,52.06 3.81,50.55 J14.4
MISO7
  Top 0.178: U8.6 26.15,52.06 24.64,50.55 J16.4
MISO8
  Top 0.178: U9.6 46.98,52.06 45.47,50.55 J18.4
N$1  (via drill 0.38)
  Top 0.178: R4.2 29.3,14.9 28.96,15.24 v28.45,15.24
  Bottom 0.178: SJ5.1 v28.45,15.24
N$2  (via drill 0.38)
  Top 0.178: R3.2 32.68,14.9 33.02,15.24 v33.53,15.24
  Bottom 0.178: SJ5.3 v33.53,15.24
N$3  (via drill 0.38)
  Top 0.178: R6.2 50.13,14.9 49.78,15.24 v49.28,15.24
  Bottom 0.178: SJ9.1 v49.28,15.24
N$4  (via drill 0.38)
  Top 0.178: R2.2 8.47,14.9 8.13,15.24 v7.62,15.24
  Bottom 0.178: SJ2.1 v7.62,15.24
N$5  (via drill 0.38)
  Top 0.178: R1.2 11.85,14.9 12.19,15.24 v12.7,15.24
  Bottom 0.178: SJ2.3 v12.7,15.24
N$6  (via drill 0.38)
  Top 0.178: R5.2 53.51,14.9 53.85,15.24 v54.36,15.24
  Bottom 0.178: SJ9.3 v54.36,15.24
N$7  (via drill 0.38)
  Top 0.178: R8.2 8.47,35.73 8.13,36.07 v7.62,36.07
  Bottom 0.178: SJ13.1 v7.62,36.07
N$8  (via drill 0.38)
  Top 0.178: R7.2 11.85,35.73 12.19,36.07 v12.7,36.07
  Bottom 0.178: SJ13.3 v12.7,36.07
N$9  (via drill 0.38)
  Top 0.178: R10.2 29.3,35.73 28.96,36.07 v28.45,36.07
  Bottom 0.178: SJ17.1 v28.45,36.07
N$10  (via drill 0.38)
  Top 0.178: R9.2 32.68,35.73 33.02,36.07 v33.53,36.07
  Bottom 0.178: SJ17.3 v33.53,36.07
N$11  (via drill 0.38)
  Top 0.178: R12.2 50.13,35.73 49.78,36.07 v49.28,36.07
  Bottom 0.178: SJ21.1 v49.28,36.07
N$12  (via drill 0.38)
  Top 0.178: R11.2 53.51,35.73 53.85,36.07 v54.36,36.07
  Bottom 0.178: SJ21.3 v54.36,36.07
N$13  (via drill 0.38)
  Top 0.178: R14.2 8.47,56.55 8.13,56.9 v7.62,56.9
  Bottom 0.178: SJ25.1 v7.62,56.9
N$14  (via drill 0.38)
  Top 0.178: R13.2 11.85,56.55 12.19,56.9 v12.7,56.9
  Bottom 0.178: SJ25.3 v12.7,56.9
N$15  (via drill 0.38)
  Top 0.178: R16.2 29.3,56.55 28.96,56.9 v28.45,56.9
  Bottom 0.178: SJ29.1 v28.45,56.9
N$16  (via drill 0.38)
  Top 0.178: R15.2 32.68,56.55 33.02,56.9 v33.53,56.9
  Bottom 0.178: SJ29.3 v33.53,56.9
N$17  (via drill 0.38)
  Top 0.178: R18.2 50.13,56.55 49.78,56.9 v49.28,56.9
  Bottom 0.178: SJ33.1 v49.28,56.9
N$18  (via drill 0.38)
  Top 0.178: R17.2 53.51,56.55 53.85,56.9 v54.36,56.9
  Bottom 0.178: SJ33.3 v54.36,56.9
SCL  (via drill 0.38)
  Top 0.178: R1.1 13.55,14.82 v13.97,15.24 13.34,15.88 9.78,15.88 9.4,15.49 9.4,12.7 9.91,12.18 U1.3
  Bottom 0.178: J2.3 7.62,6.35 10.16,8.89 15.24,8.89 | 15.24,8.89 J1.4 | v13.97,15.24 15.24,13.97 15.24,8.89
SCL1  (via drill 0.38)
  Top 0.178: R3.1 34.38,14.82 v34.8,15.24 34.16,15.88 30.61,15.88 30.23,15.49 30.23,12.7 30.74,12.18 U2.3
  Bottom 0.178: J4.3 28.45,6.35 30.99,8.89 36.07,8.89 | 36.07,8.89 J3.4 | v34.8,15.24 36.07,13.97 36.07,8.89
SCL2  (via drill 0.38)
  Top 0.178: R5.1 55.21,14.82 v55.63,15.24 54.99,15.88 51.44,15.88 51.05,15.49 51.05,12.7 51.57,12.18 U3.3
  Bottom 0.178: J6.3 49.28,6.35 51.82,8.89 56.9,8.89 | 56.9,8.89 J5.4 | v55.63,15.24 56.9,13.97 56.9,8.89
SCL3  (via drill 0.38)
  Top 0.178: R7.1 13.55,35.65 v13.97,36.07 13.34,36.7 9.78,36.7 9.4,36.32 9.4,33.53 9.91,33.01 U4.3
  Bottom 0.178: J8.3 7.62,27.18 10.16,29.72 15.24,29.72 | 15.24,29.72 J7.4 | v13.97,36.07 15.24,34.8 15.24,29.72
SCL4  (via drill 0.38)
  Top 0.178: R9.1 34.38,35.65 v34.8,36.07 34.16,36.7 30.61,36.7 30.23,36.32 30.23,33.53 30.74,33.01 U5.3
  Bottom 0.178: J10.3 28.45,27.18 30.99,29.72 36.07,29.72 | 36.07,29.72 J9.4 | v34.8,36.07 36.07,34.8 36.07,29.72
SCL5  (via drill 0.38)
  Top 0.178: R11.1 55.21,35.65 v55.63,36.07 54.99,36.7 51.44,36.7 51.05,36.32 51.05,33.53 51.57,33.01 U6.3
  Bottom 0.178: J12.3 49.28,27.18 51.82,29.72 56.9,29.72 | 56.9,29.72 J11.4 | v55.63,36.07 56.9,34.8 56.9,29.72
SCL6  (via drill 0.38)
  Top 0.178: R13.1 13.55,56.48 v13.97,56.9 13.34,57.53 9.78,57.53 9.4,57.15 9.4,54.36 9.91,53.84 U7.3
  Bottom 0.178: J14.3 7.62,48.01 10.16,50.55 15.24,50.55 | 15.24,50.55 J13.4 | v13.97,56.9 15.24,55.63 15.24,50.55
SCL7  (via drill 0.38)
  Top 0.178: R15.1 34.38,56.48 v34.8,56.9 34.16,57.53 30.61,57.53 30.23,57.15 30.23,54.36 30.74,53.84 U8.3
  Bottom 0.178: J16.3 28.45,48.01 30.99,50.55 36.07,50.55 | 36.07,50.55 J15.4 | v34.8,56.9 36.07,55.63 36.07,50.55
SCL8  (via drill 0.38)
  Top 0.178: R17.1 55.21,56.48 v55.63,56.9 54.99,57.53 51.44,57.53 51.05,57.15 51.05,54.36 51.57,53.84 U9.3
  Bottom 0.178: J18.3 49.28,48.01 51.82,50.55 56.9,50.55 | 56.9,50.55 J17.4 | v55.63,56.9 56.9,55.63 56.9,50.55
SDA  (via drill 0.38)
  Top 0.178: U1.5 8.14,10.91 7.62,11.43 v6.99,11.43 | J1.3 15.24,6.35 13.97,7.62 v13.97,10.16 | R2.1 6.77,12.79 6.99,12.57 v6.99,11.43 | v6.99,11.43 J2.5
  Bottom 0.178: v13.97,10.16 13.34,9.53 9.53,9.53 7.62,11.43 v6.99,11.43
SDA1  (via drill 0.38)
  Top 0.178: U2.5 28.97,10.91 28.45,11.43 v27.81,11.43 | J3.3 36.07,6.35 34.8,7.62 v34.8,10.16 | R4.1 27.6,12.79 27.81,12.57 v27.81,11.43 | v27.81,11.43 J4.5
  Bottom 0.178: v34.8,10.16 34.16,9.53 30.35,9.53 28.45,11.43 v27.81,11.43
SDA2  (via drill 0.38)
  Top 0.178: U3.5 49.8,10.91 49.28,11.43 v48.64,11.43 | J5.3 56.9,6.35 55.63,7.62 v55.63,10.16 | R6.1 48.43,12.79 48.64,12.57 v48.64,11.43 | v48.64,11.43 J6.5
  Bottom 0.178: v55.63,10.16 54.99,9.53 51.18,9.53 49.28,11.43 v48.64,11.43
SDA3  (via drill 0.38)
  Top 0.178: U4.5 8.14,31.73 7.62,32.26 v6.99,32.26 | J7.3 15.24,27.18 13.97,28.45 v13.97,30.99 | R8.1 6.77,33.62 6.99,33.4 v6.99,32.26 | v6.99,32.26 J8.5
  Bottom 0.178: v13.97,30.99 13.34,30.35 9.53,30.35 7.62,32.26 v6.99,32.26
SDA4  (via drill 0.38)
  Top 0.178: U5.5 28.97,31.73 28.45,32.26 v27.81,32.26 | J9.3 36.07,27.18 34.8,28.45 v34.8,30.99 | R10.1 27.6,33.62 27.81,33.4 v27.81,32.26 | v27.81,32.26 J10.5
  Bottom 0.178: v34.8,30.99 34.16,30.35 30.35,30.35 28.45,32.26 v27.81,32.26
SDA5  (via drill 0.38)
  Top 0.178: U6.5 49.8,31.73 49.28,32.26 v48.64,32.26 | J11.3 56.9,27.18 55.63,28.45 v55.63,30.99 | R12.1 48.43,33.62 48.64,33.4 v48.64,32.26 | v48.64,32.26 J12.5
  Bottom 0.178: v55.63,30.99 54.99,30.35 51.18,30.35 49.28,32.26 v48.64,32.26
SDA6  (via drill 0.38)
  Top 0.178: U7.5 8.14,52.56 7.62,53.09 v6.99,53.09 | J13.3 15.24,48.01 13.97,49.28 v13.97,51.82 | R14.1 6.77,54.44 6.99,54.23 v6.99,53.09 | v6.99,53.09 J14.5
  Bottom 0.178: v13.97,51.82 13.34,51.18 9.53,51.18 7.62,53.09 v6.99,53.09
SDA7  (via drill 0.38)
  Top 0.178: U8.5 28.97,52.56 28.45,53.09 v27.81,53.09 | J15.3 36.07,48.01 34.8,49.28 v34.8,51.82 | R16.1 27.6,54.44 27.81,54.23 v27.81,53.09 | v27.81,53.09 J16.5
  Bottom 0.178: v34.8,51.82 34.16,51.18 30.35,51.18 28.45,53.09 v27.81,53.09
SDA8  (via drill 0.38)
  Top 0.178: U9.5 49.8,52.56 49.28,53.09 v48.64,53.09 | J17.3 56.9,48.01 55.63,49.28 v55.63,51.82 | R18.1 48.43,54.44 48.64,54.23 v48.64,53.09 | v48.64,53.09 J18.5
  Bottom 0.178: v55.63,51.82 54.99,51.18 51.18,51.18 49.28,53.09 v48.64,53.09
TRIG  (via drill 0.38)
  Top 0.178: U1.7 6.73,9.91 v6.35,9.53 | J1.6 16.51,13.97 13.97,16.51 6.35,16.51 5.08,15.24 v5.08,12.7
  Bottom 0.178: v5.08,12.7 5.08,10.79 v6.35,9.53
TRIG1  (via drill 0.38)
  Top 0.178: U2.7 27.56,9.91 v27.18,9.53 | J3.6 37.34,13.97 34.8,16.51 27.18,16.51 25.91,15.24 v25.91,12.7
  Bottom 0.178: v25.91,12.7 25.91,10.79 v27.18,9.53
TRIG2  (via drill 0.38)
  Top 0.178: U3.7 48.39,9.91 v48.01,9.53 | J5.6 58.17,13.97 55.63,16.51 48.01,16.51 46.74,15.24 v46.74,12.7
  Bottom 0.178: v46.74,12.7 46.74,10.79 v48.01,9.53
TRIG3  (via drill 0.38)
  Top 0.178: U4.7 6.73,30.73 v6.35,30.35 | J7.6 16.51,34.8 13.97,37.34 6.35,37.34 5.08,36.07 v5.08,33.53
  Bottom 0.178: v5.08,33.53 5.08,31.62 v6.35,30.35
TRIG4  (via drill 0.38)
  Top 0.178: U5.7 27.56,30.73 v27.18,30.35 | J9.6 37.34,34.8 34.8,37.34 27.18,37.34 25.91,36.07 v25.91,33.53
  Bottom 0.178: v25.91,33.53 25.91,31.62 v27.18,30.35
TRIG5  (via drill 0.38)
  Top 0.178: U6.7 48.39,30.73 v48.01,30.35 | J11.6 58.17,34.8 55.63,37.34 48.01,37.34 46.74,36.07 v46.74,33.53
  Bottom 0.178: v46.74,33.53 46.74,31.62 v48.01,30.35
TRIG6  (via drill 0.38)
  Top 0.178: U7.7 6.73,51.56 v6.35,51.18 | J13.6 16.51,55.63 13.97,58.17 6.35,58.17 5.08,56.9 v5.08,54.36
  Bottom 0.178: v5.08,54.36 5.08,52.45 v6.35,51.18
TRIG7  (via drill 0.38)
  Top 0.178: U8.7 27.56,51.56 v27.18,51.18 | J15.6 37.34,55.63 34.8,58.17 27.18,58.17 25.91,56.9 v25.91,54.36
  Bottom 0.178: v25.91,54.36 25.91,52.45 v27.18,51.18
TRIG8  (via drill 0.38)
  Top 0.178: U9.7 48.39,51.56 v48.01,51.18 | J17.6 58.17,55.63 55.63,58.17 48.01,58.17 46.74,56.9 v46.74,54.36
  Bottom 0.178: v46.74,54.36 46.74,52.45 v48.01,51.18

## Text on the board
tPlace: Y | X | Y | X | Y | X | Z | Z | Z | CS | TRIG | CS | TRIG | CS | TRIG | MISO | INT | MISO | INT | MISO | INT | MOSI | SCL | MOSI | SCL | MOSI | SCL | MLX90393 | MLX90393 | MLX90393 | SCLK | SDA | SCLK | SDA | SCLK | SDA | 3.3V | 3.3V | 3.3V | 3.3V | 3.3V | 3.3V | GND | GND | GND | GND | GND | GND | Y | X | Y | X | Y | X | Z | Z | Z | CS | TRIG | CS | TRIG | CS | TRIG | MISO | INT | MISO | INT | MISO | INT | MOSI | SCL | MOSI | SCL | MOSI | SCL | MLX90393 | MLX90393 | MLX90393 | SCLK | SDA | SCLK | SDA | SCLK | SDA | 3.3V | 3.3V | 3.3V | 3.3V | 3.3V | 3.3V | GND | GND | GND | GND | GND | GND | Y | X | Y | X | Y | X | Z | Z | Z | CS | TRIG | CS | TRIG | CS | TRIG | MISO | INT | MISO | INT | MISO | INT | MOSI | SCL | MOSI | SCL | MOSI | SCL | MLX90393 | MLX90393 | MLX90393 | SCLK | SDA | SCLK | SDA | SCLK | SDA | 3.3V | 3.3V | 3.3V | 3.3V | 3.3V | 3.3V | GND | GND | GND | GND | GND | GND
bPlace: CS | CS | CS | CS | PU | TRIG | CS | PU | TRIG | CS | PU | TRIG | MISO | INT | MISO | INT | MISO | INT | MOSI | SCL | MOSI | SCL | MOSI | SCL | SCLK | SDA | SCLK | SDA | SCLK | SDA | 3.3V | A1 | A0 | 3.3V | 3.3V | A1 | A0 | 3.3V | 3.3V | A1 | A0 | 3.3V | GND | GND | GND | GND | GND | GND | CS | CS | CS | CS | PU | TRIG | CS | PU | TRIG | CS | PU | TRIG | MISO | INT | MISO | INT | MISO | INT | MOSI | SCL | MOSI | SCL | MOSI | SCL | SCLK | SDA | SCLK | SDA | SCLK | SDA | 3.3V | A1 | A0 | 3.3V | 3.3V | A1 | A0 | 3.3V | 3.3V | A1 | A0 | 3.3V | GND | GND | GND | GND | GND | GND | CS | CS | CS | CS | PU | TRIG | CS | PU | TRIG | CS | PU | TRIG | MISO | INT | MISO | INT | MISO | INT | MOSI | SCL | MOSI | SCL | MOSI | SCL | SCLK | SDA | SCLK | SDA | SCLK | SDA | 3.3V | A1 | A0 | 3.3V | 3.3V | A1 | A0 | 3.3V | 3.3V | A1 | A0 | 3.3V | GND | GND | GND | GND | GND | GND